# Altium PCB [R0] BlackChat China Rx - BlackChat.PcbDoc
Units mil, origin at the board's own origin, x right, y up, seen from the top; angles counter-clockwise.
Board outline 6000 x 4000 mil, 2 copper layers (Top Layer, Bottom Layer); 34 components, 19 nets, 76 pads, 0 vias.
Unrouted connection lines stored in the file: 45.
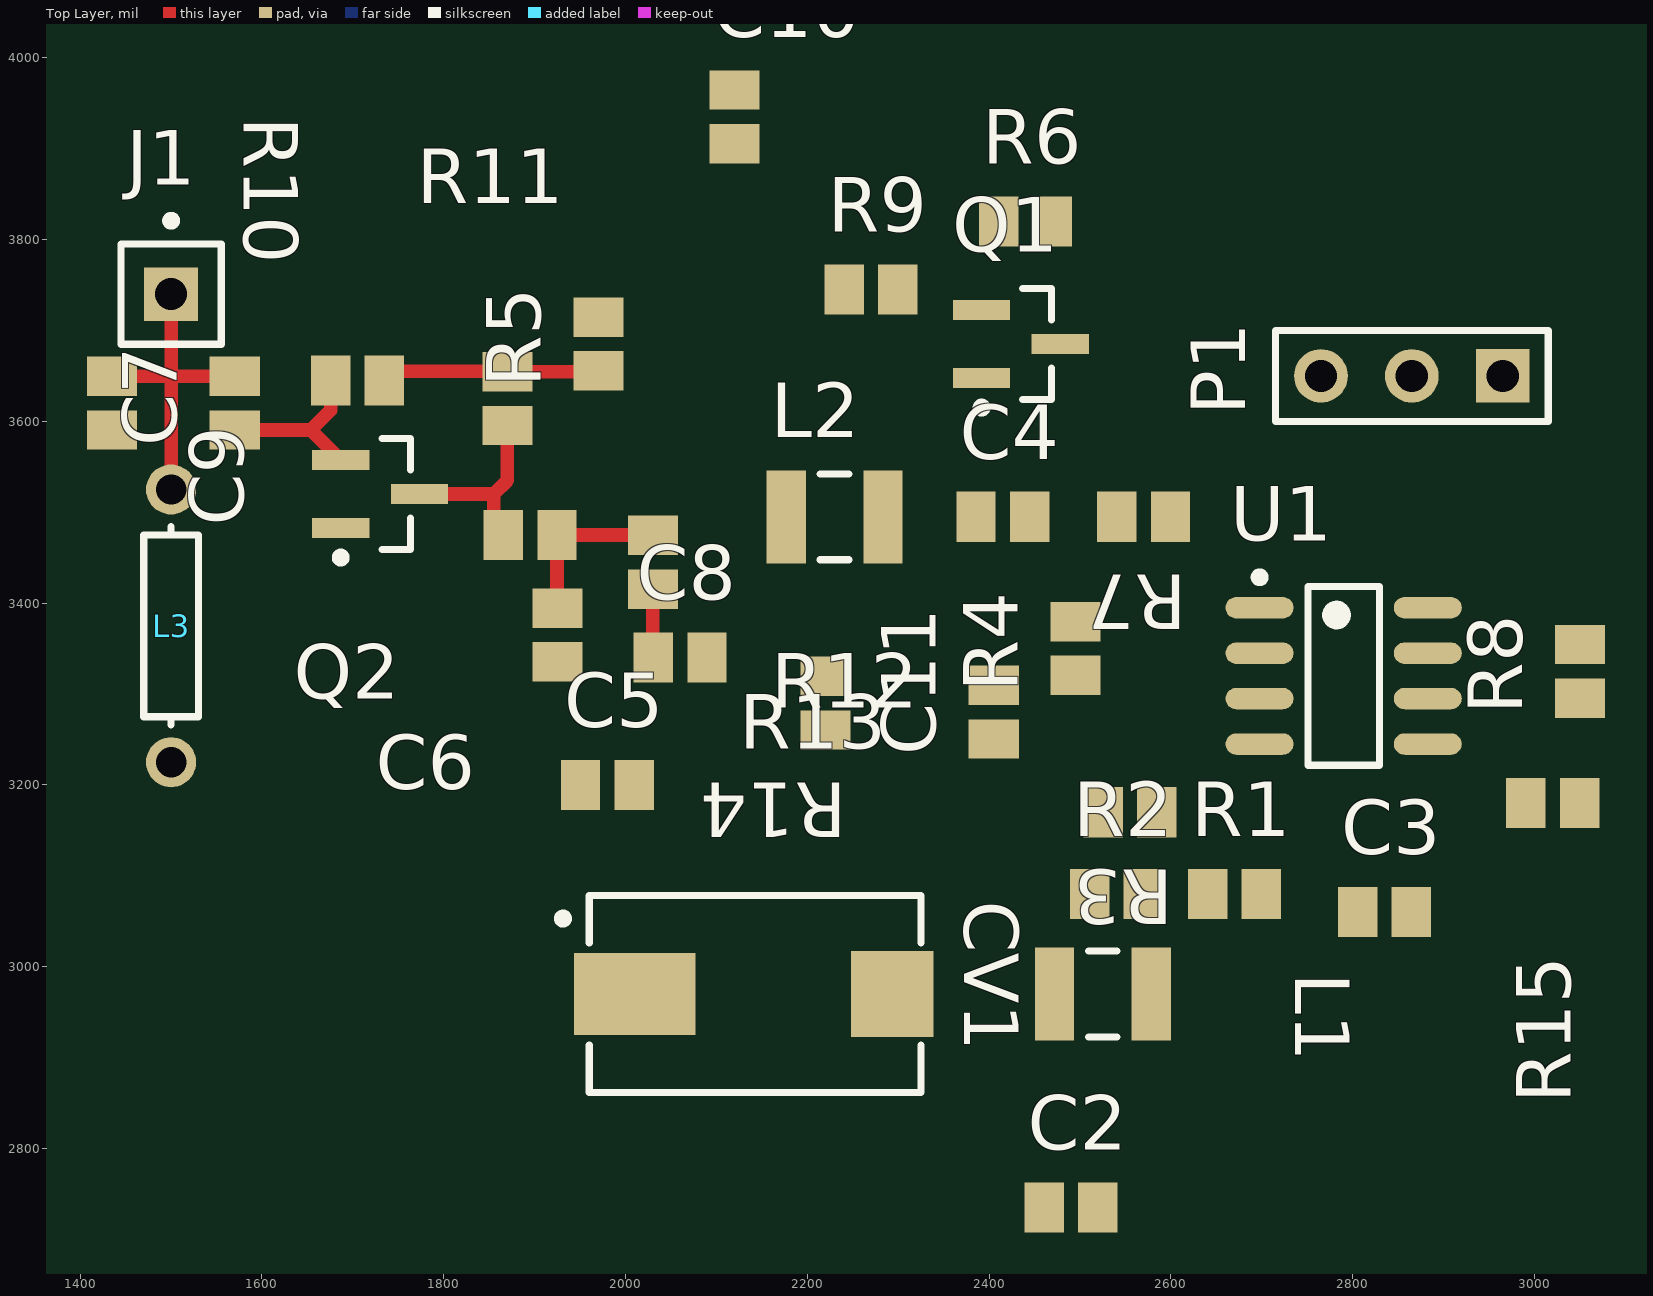
[diagram p0: Top Layer view]
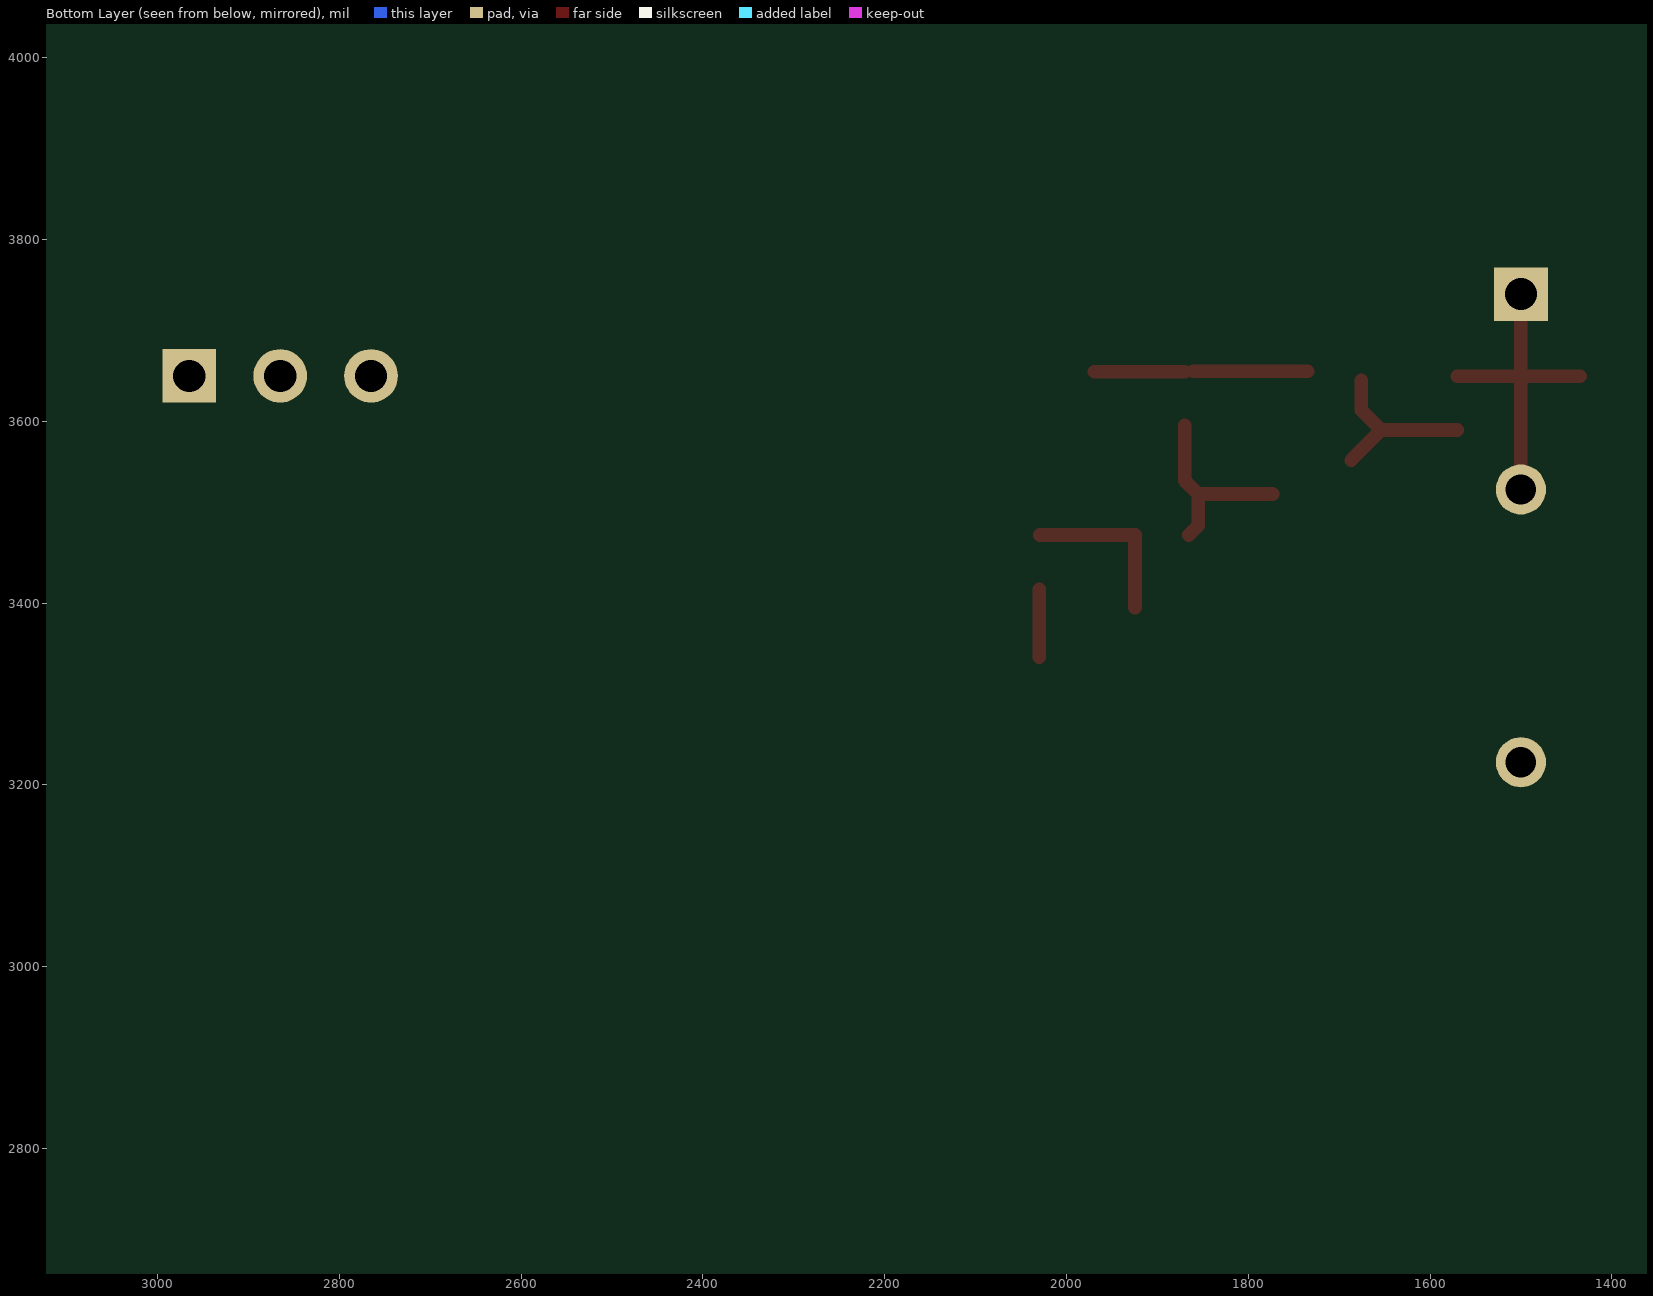
[diagram p1: Bottom Layer view, seen from below]

## Layer stack, top to bottom
Top Layer: signal copper 1.4
Dielectric: dielectric 12.6, FR-4, Dk 4.8
Bottom Layer: signal copper 1.4

## Board outline
1000,1000 7000,1000 7000,5000 1000,5000

## Design rules (kind name [scope] priority, off if disabled: settings)
Clearance [All] p1: gap=10
PolygonConnect [All] p1: connectstyle=Relief reliefconductorwidth=10 reliefentries=4 polygonreliefangle="90 Angle" airgapwidth=10
RoutingVias [All] p1: holewidth=28 width=50 viastyle="Through Hole" minholewidth=28 minwidth=50 maxholewidth=28 maxwidth=50
SolderMaskExpansion [All] p1: expansion=4
Width [All] p1: maxlimit=100 minlimit=5 preferedwidth=15 minimp=50.000000 maximp=50.000000 favimp=50.000000
28 further rules are at their usual default settings.

## Components (designator, comment, footprint, x,y, rotation, side; value= is the part's Value field where it differs from the comment)
C2 "1pF" CAP-0805 2490,2735 r0 top
C3 "1pF" CAP-0805 2835,3060 r0 top
C4 "1pF" CAP-0805 2415,3495 r0 top
C5 "1pF" CAP-0805 1980,3200 r0 top
C6 "1pF" CAP-0805 1895,3475 r0 top
C7 "1pF" CAP-0805 1570,3620 r90 top
C8 "1pF" CAP-0805 2060,3340 r0 top
C9 "1pF" CAP-0805 1435,3620 r90 top
C10 "1pF" CAP-0805 2120,3935 r90 top
C11 "1pF" CAP-0805 2405,3280 r90 top
CV1 "0.5-4.5pf" CAP-GSX364 2010,2970 r0 top
J1 "Socket" PIN1 1500,3740 r0 top
L1 "1uH" C1210 2525,2970 r0 top
L2 "47nH" C1210 2230,3495 r0 top
L3 "1uH" AXIAL-0.3 1500,3375 r90 top
P1 "Header 3" HDR1X3 2965,3650 r180 top
Q1 "NE68033" SOT95P275X120-3N 2435,3685 r0 top
Q2 "NE68033" SOT95P275X120-3N 1730,3520 r0 top
R1 "1K" RES-0805 2670,3080 r0 top
R2 "1K" RES-0805 2540,3080 r0 top
R3 "1K" RES-0805 2555,3170 r180 top
R4 "1K" RES-0805 2495,3350 r90 top
R5 "1K" RES-0805 1970,3685 r90 top
R6 "1K" RES-0805 2440,3820 r0 top
R7 "1K" RES-0805 2570,3495 r180 top
R8 "1K" RES-0805 3050,3325 r90 top
R9 "1K" RES-0805 2270,3745 r0 top
R10 "1K" RES-0805 1705,3645 r0 top
R11 "1K" RES-0805 1870,3625 r90 top
R12 "1K" RES-0805 2030,3445 r90 top
R13 "1K" RES-0805 1925,3365 r90 top
R14 "1K" RES-0805 2220,3290 r270 top
R15 "1K" RES-0805 3020,3180 r180 top
U1 "LM358M/NOPB" M08A_L 2790,3320 r0 top

## Footprints (in the part's own frame and the unit in brackets; to place one, negate y for a bottom-side part, rotate by r counter-clockwise, add the part's x,y. Pads: shape width x height; smd on the part's side, far side on the other; paste and mask are expansions set on the pad)
AXIAL-0.3 [mm] "Axial Device, Thru-Hole; 2 Leads; 0.3 in Pin Spacing"
  round 1.4 hole 0.85: 1(-3.81,0) 2(3.81,0)
  silkscreen extent -2.77,-0.76 2.77,0.76
C1210 [mm] "Chip Capacitor, Body 3.2x2.5mm, IPC High Density"
  rect 1.1x2.6 smd: 1(-1.35,0) 2(1.35,0)
  silkscreen extent -0.4,-1.2 0.4,1.2, body extent -1.7,-1.35 1.7,1.35, height 1.3
CAP-0805 [mm] "Chip Capacitor, Body 2.0x1.3mm, IPC High Density"
  rect 1.1x1.4 smd: 1(-0.75,0) 2(0.75,0)
  body extent -1.1,-0.72 1.1,0.72, height 1.4
CAP-GSX364 [mm] "Trimmer / Variable Capacitors .5-4.5 PF 100V"
  rect 3.4x2.3 smd: 1(0,0)
  rect 2.3x2.4 smd: 2(7.2,0)
  silkscreen extent -2.13,-2.75 8,2.75, body extent -1.27,-2.7 8,2.7, height 2.2
HDR1X3 [mm] "Connector; Header; 3 Position"
  rect 1.5x1.5 hole 0.9: 1(0,0)
  round 1.5 hole 0.9: 2(2.54,0) 3(5.08,0)
  silkscreen extent -1.27,-1.27 6.35,1.27
M08A_L [mm] "SOIC, 8-Leads, Body 4.9x3.9mm, Pitch 1.27mm, IPC High Density"
  oval 1.9x0.6 smd: 1(-2.35,1.905) 2(-2.35,0.635) 3(-2.35,-0.635) 4(-2.35,-1.905) 5(2.35,-1.905) 6(2.35,-0.635) 7(2.35,0.635) 8(2.35,1.905)
  silkscreen extent -2.47,-2.5 1,2.88, body extent -2,-2.5 2,2.5, height 1.75
PIN1 [mm] "Connector; Plug"
  rect 1.5x1.5 hole 0.9: 1(0,0)
  silkscreen extent -1.4,-1.4 1.4,2.17
RES-0805 [mm] "Chip Resistor, Body 2.0x1.3mm, IPC High Density"
  rect 1.1x1.4 smd: 1(-0.75,0) 2(0.75,0)
  body extent -1.1,-0.72 1.1,0.72, height 1.4
SOT95P275X120-3N [mm] "SOT23, 3-Leads, Body 2.90x2.75mm, Pitch 0.95mm, IPC Medium Density"
  rect 1.6x0.55 smd: 1(-1.1,-0.95) 2(-1.1,0.95) 3(1.1,0)
  silkscreen extent -1.22,-1.9 0.85,1.55, body extent -0.85,-1.55 0.85,1.55, height 1.2

## Part data
C2 C3 C4 C5 C6 C7 C8 C9 C10 C11: library part CHIP-CAP, "SMD Chip Capacitor"
CV1: library part GSX364, "0.5pF to 4.5pF variable capacitor."
L1 L2 L3: library part Inductor, "Generic Inductor"
P1: "Header, 3-Pin"
Q1 Q2: "NPN SILICON HIGH FREQUENCY TRANSISTOR"
R1 R2 R3 R4 R5 R6 R7 R8 R9 R10 R11 R12 R13 R14 R15: library part CHIP-RES, "SMD Chip Resistor"
U1: library part CMP-0055-00634-2, "Low Power Dual Operational Amplifier, 8-pin Narrow SOIC, Pb-Free"

## Nets (pads, with @x,y where several pads share a name; then routed paths per layer and width w, separated by ;. In a path a pad name is that pad's centre, name@x,y a point inside that pad or via, vN(x,y) a via of type N, cw(c..) or ccw(c..) an arc to the next point about the centre after c; other vN are vias at no path point)
5V0: C2.2 C3.1 C10.1 L1.2 P1.1 Q1.3 R1.2 R5.2 R6.2 R7.1 U1.8
ANTENNA: C7.2 C9.2 J1.1 L3.2 | length 350
  Top Layer w15: C9.2 1500,3649.53 ; L3.2 1500,3649.53 ; J1.1 1500,3649.53 ; C7.2 1500,3649.53
DATA: P1.3 R4.2 U1.1
GND: C3.2 C9.1 C10.2 C11.1 L3.1 P1.2 Q2.1 R2.1 R9.1 R13.1 R14.2 R15.2 U1.4
NetC2_1: C2.1 CV1.2 L1.1
NetC4_1: C4.1 L2.2 Q1.1
NetC4_2: C4.2 R7.2
NetC5_1: C5.1 C6.2 L2.1 R12.2 R13.2 | length 185
  Top Layer w15: R13.2@1924.53,3395 C6.2 R12.2@2029.53,3475
NetC5_2: C5.2 CV1.1
NetC6_1: C6.1 Q2.3 R11.1 | length 212.7
  Top Layer w15: Q2.3 1855,3520 ; C6.1 1855,3485.47 1855,3520 ; R11.1 1870,3535 1855,3520
NetC7_1: C7.1 Q2.2 R10.1 | length 194
  Top Layer w15: C7.1 1653.62,3590.47 ; R10.1 1675.47,3612.32 1653.62,3590.47 ; Q2.2 1653.62,3590.47
NetC8_1: C8.1 R12.1 | length 75
  Top Layer w15: C8.1@2030,3340.47 R12.1
NetC8_2: C8.2 C11.2 R14.1 U1.5
NetQ1_2: Q1.2 R6.1 R9.2
NetR1_1: R1.1 R2.2 R3.1 U1.2
NetR3_2: R3.2 R4.1 U1.3
NetR5_1: R5.1 R10.2 R11.2 | length 225
  Top Layer w15: R10.2@1734.53,3655 R11.2@1860.47,3655 ; R11.2 R5.1@1969.06,3654.53
NetR8_1: R8.1 R15.1 U1.6
NetR8_2: R8.2 U1.7